# Altium PCB PCB1.PcbDoc
Units mm, origin at the board's own origin, x right, y up, seen from the top; angles counter-clockwise.
Board outline 94.87 x 108.46 mm, 2 copper layers (Top Layer, Bottom Layer); 18 components, 31 nets, 81 pads, 0 vias.
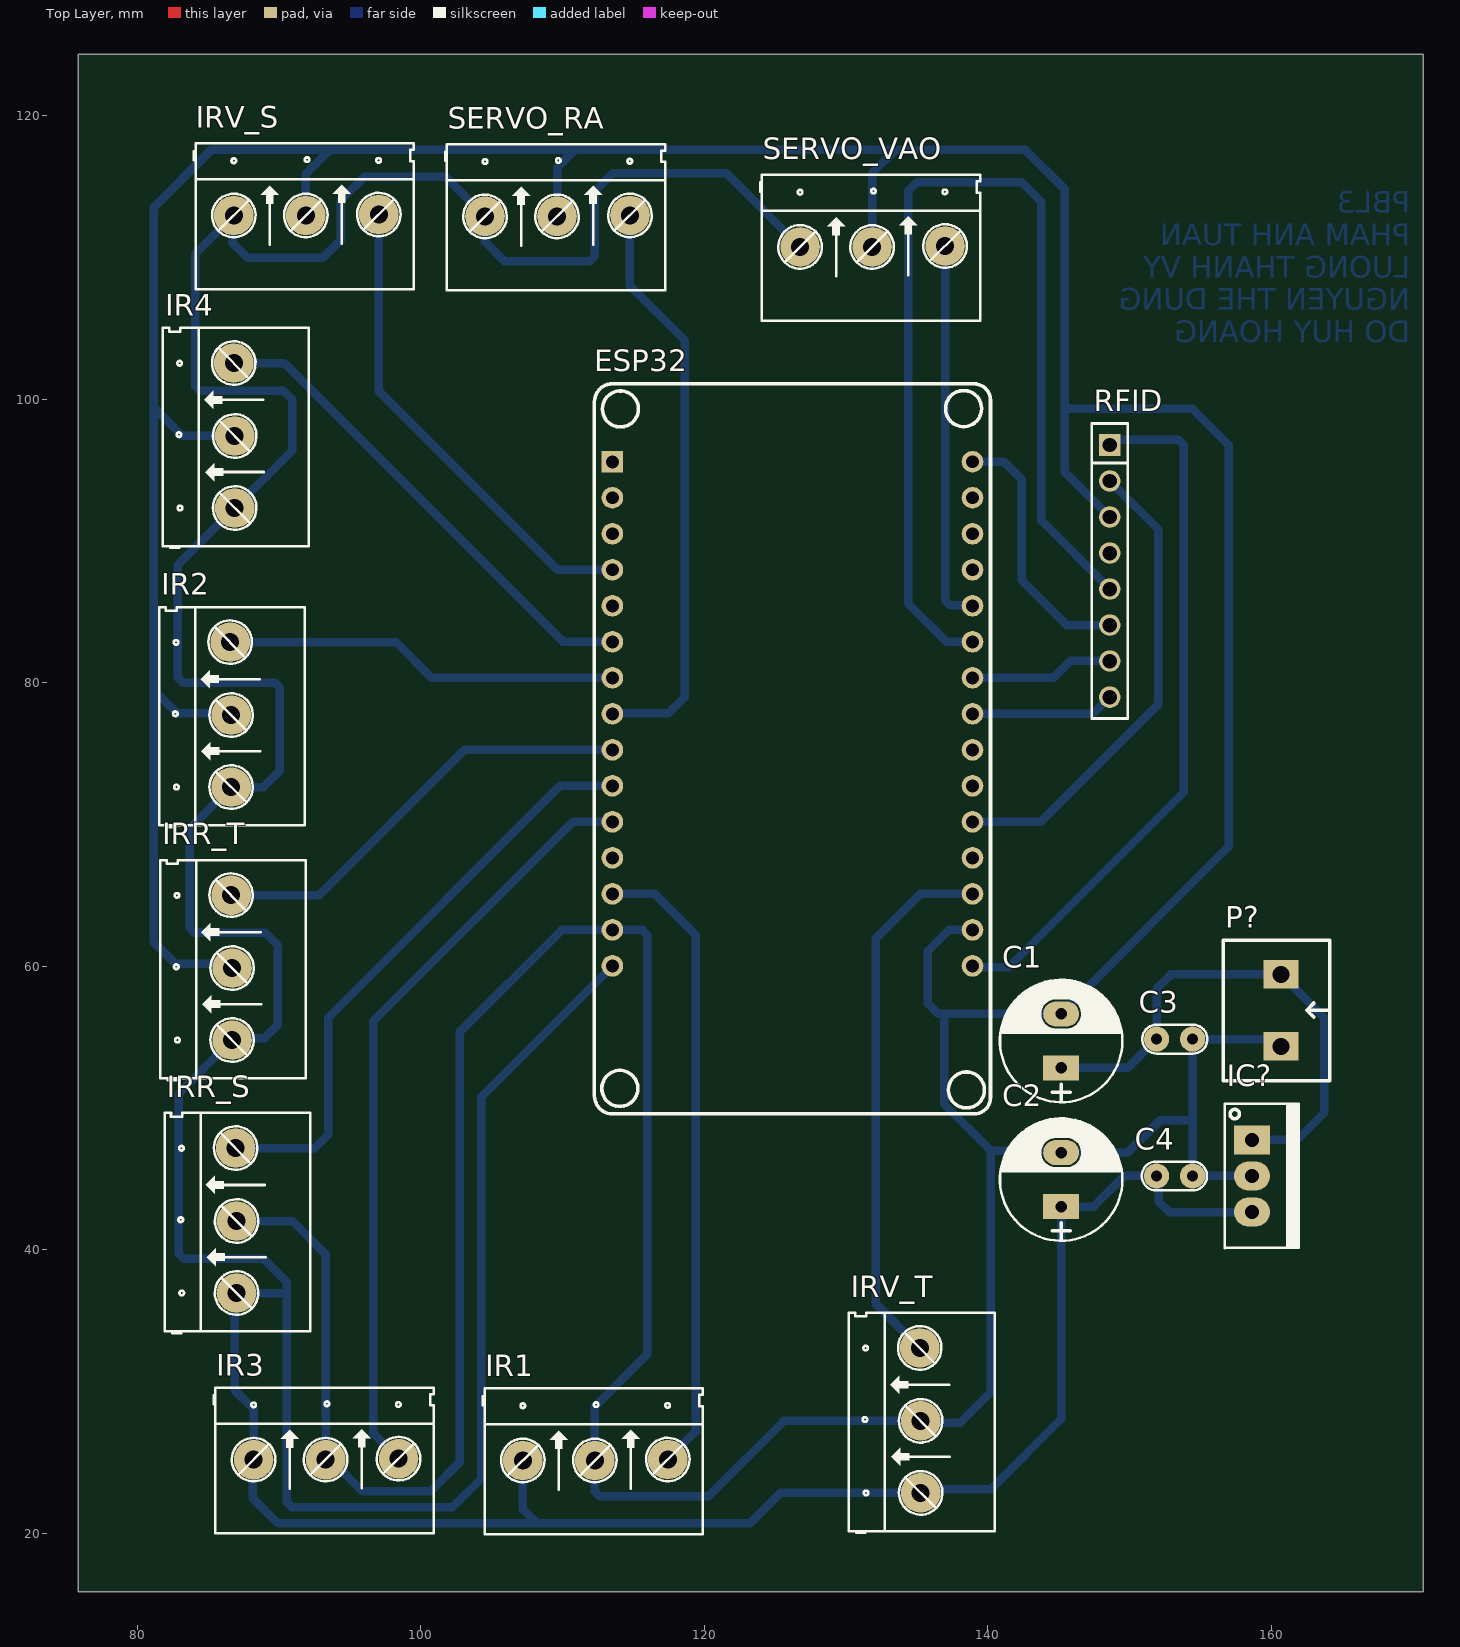
[diagram p0: Top Layer view]
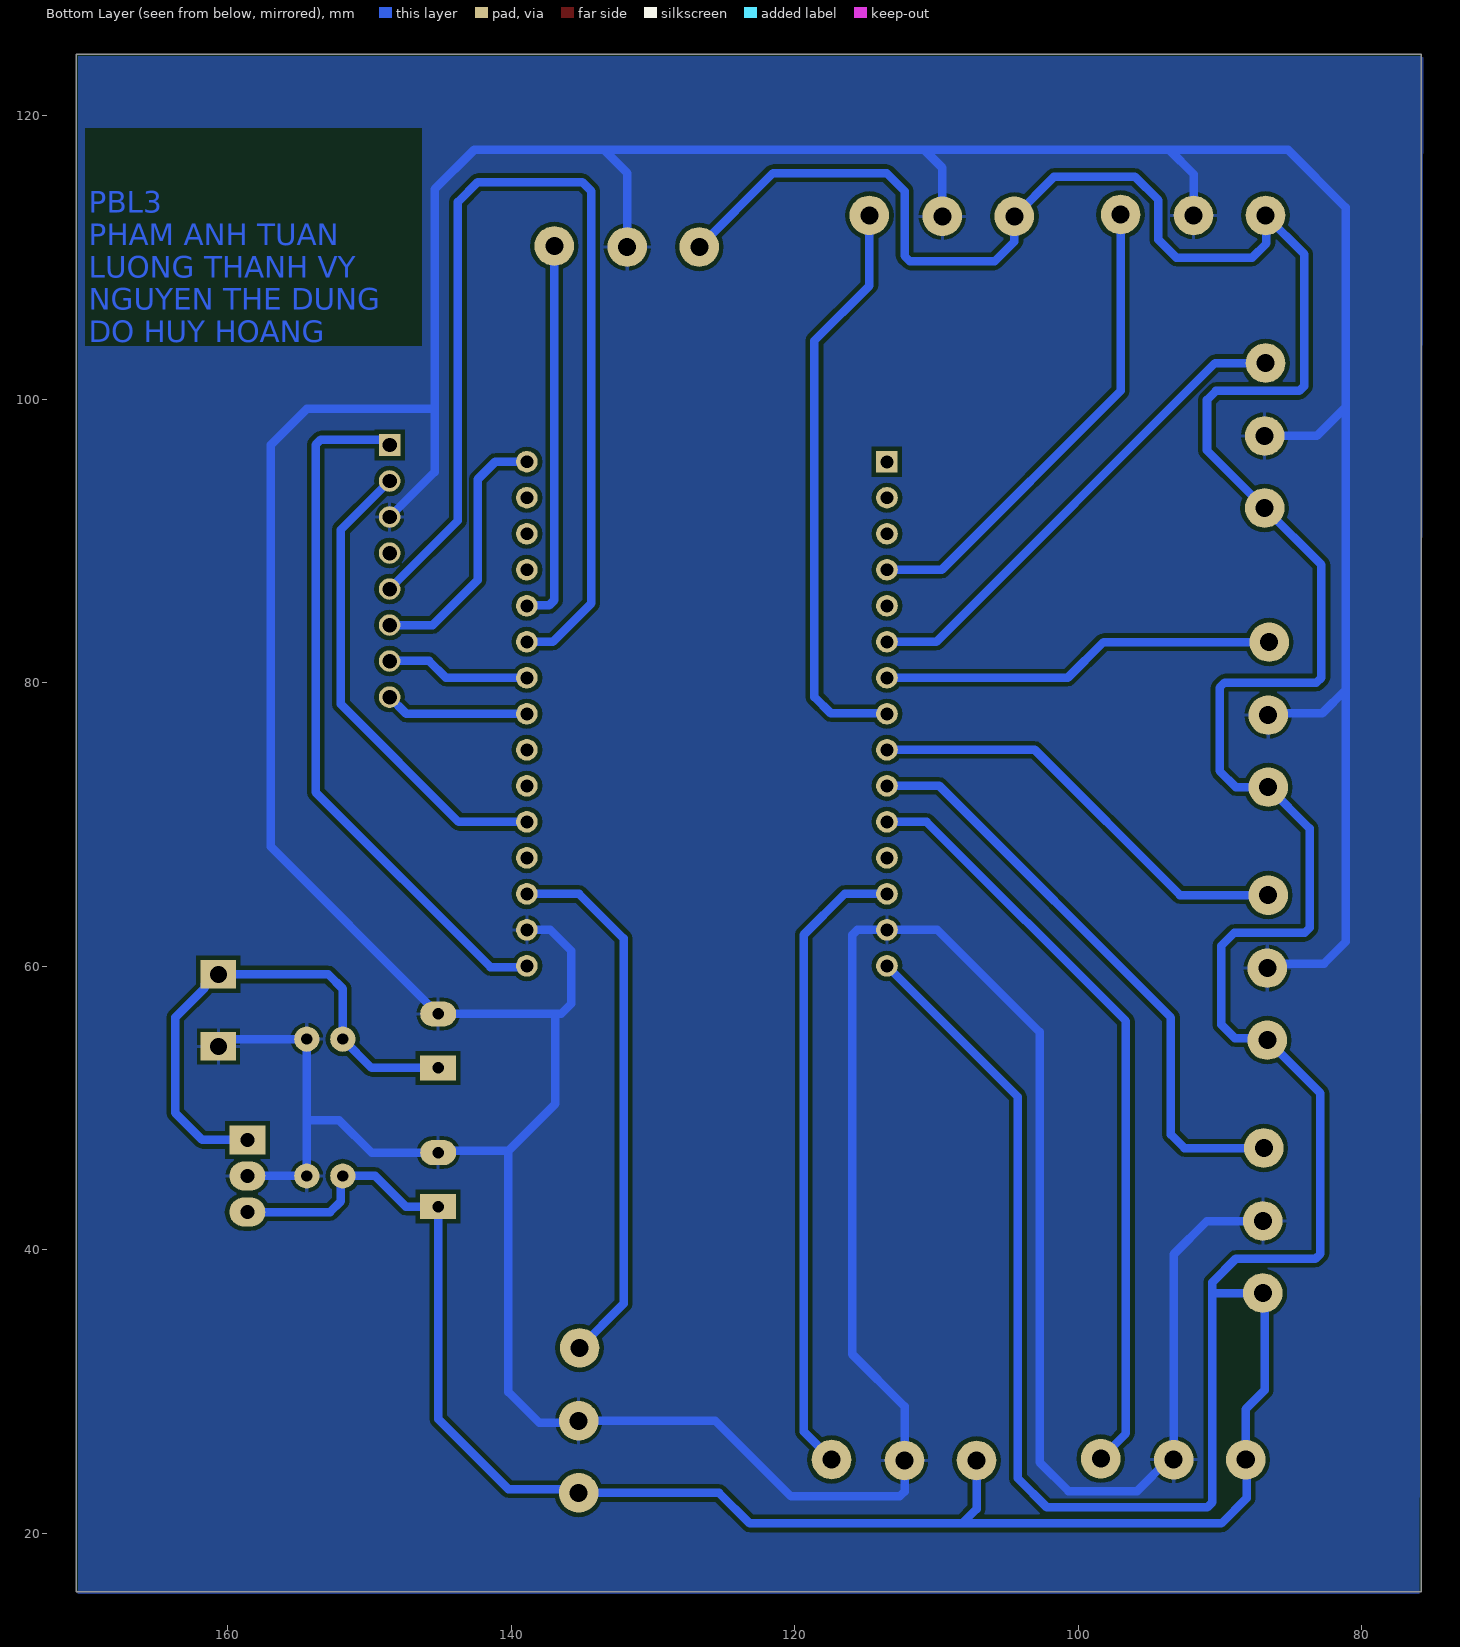
[diagram p1: Bottom Layer view, seen from below]
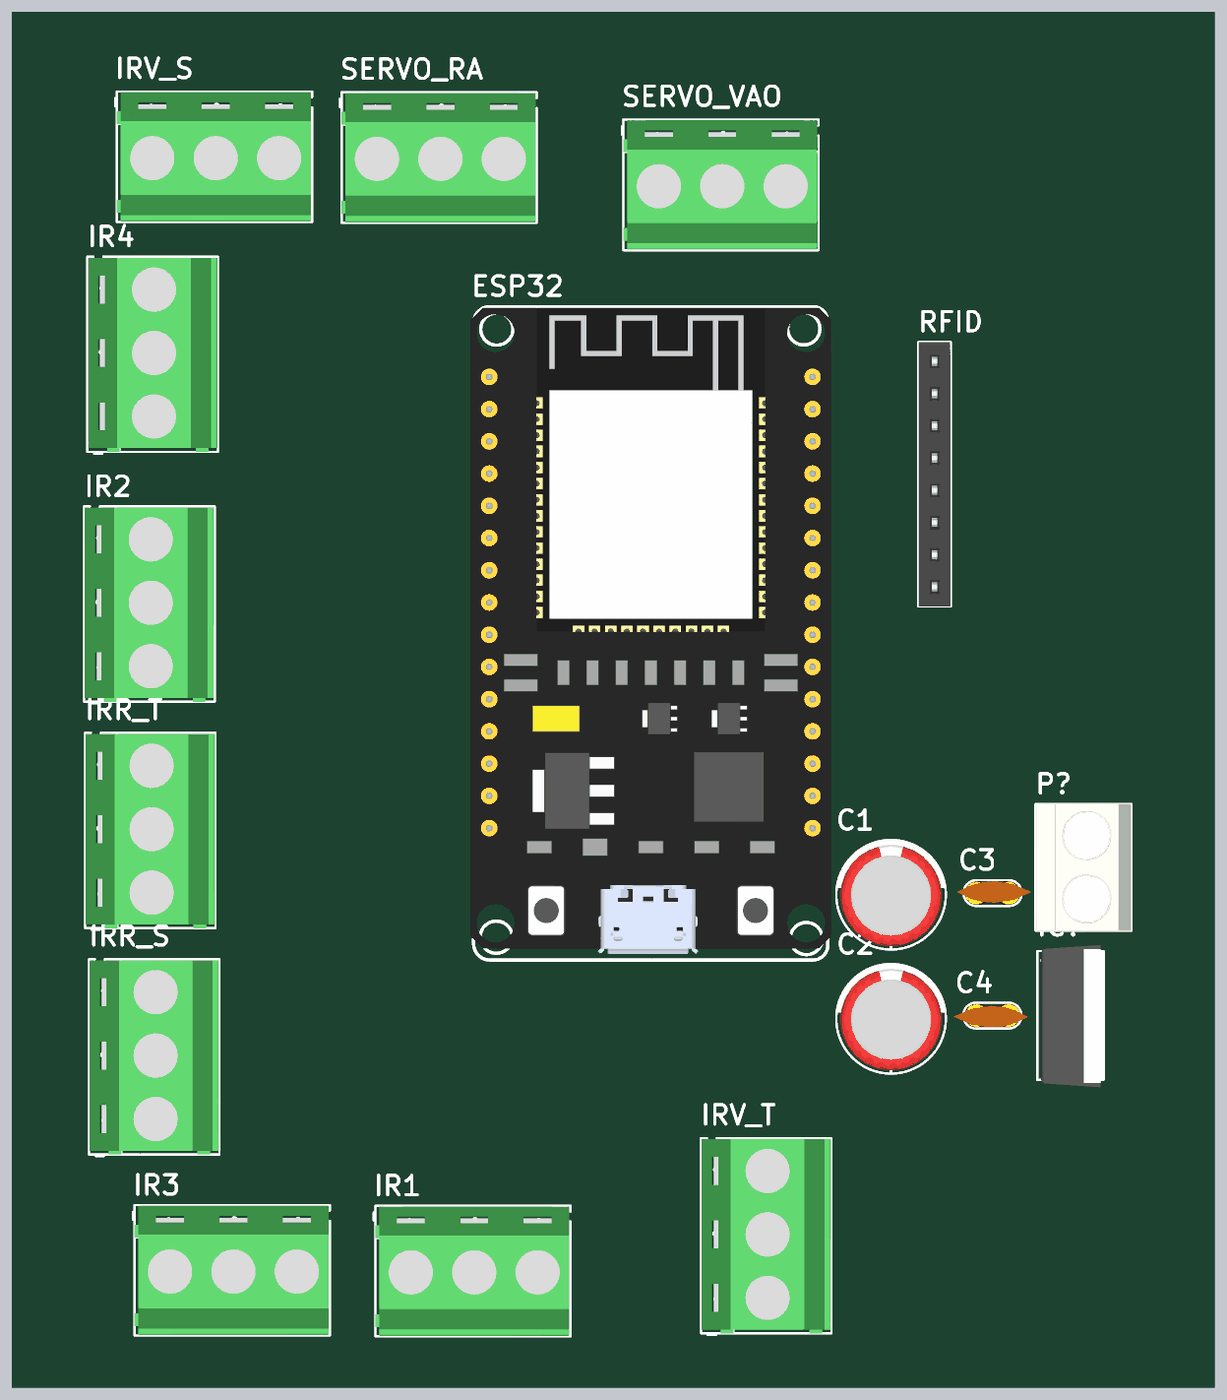
[diagram p2: 3D render of the assembled board from above, using the file's embedded part models]

## Layer stack, top to bottom
Top Solder: solder mask 0.0102, Solder Resist, Dk 3.5
Top Layer: signal copper 0.0356
Dielectric 1: dielectric 0.32, FR-4, Dk 4.8
Bottom Layer: signal copper 0.0356
Bottom Solder: solder mask 0.0102, Solder Resist, Dk 3.5

## Board outline
75.819,15.875 170.688,15.875 170.688,124.333 75.819,124.333

## Design rules (kind name [scope] priority, off if disabled: settings)
Clearance [All] p1: gap=0.25 ignorepadtopadclearanceinfootprint=FALSE except(0: Arc-Hole Track-Hole SMDPad-Hole THPad-Hole Via-Hole Fill-Hole Poly-Hole Region-Hole Text-Hole; 0.3: Arc-Fill Arc-Poly Arc-Region Track-Fill Track-Poly Track-Region SMDPad-Fill SMDPad-Poly SMDPad-Region THPad-Fill THPad-Poly THPad-Region Via-Fill Via-Poly Via-Region Fill-Fill Fill-Poly Fill-Region Poly-Poly Poly-Region Region-Region)
PolygonConnect [All] p1: connectstyle=Relief reliefconductorwidth=0.254 reliefentries=4 polygonreliefangle="90 Angle" airgapwidth=0.254
RoutingLayers [All] p1: top layer_v5=FALSE bottom layer_v5=TRUE
RoutingVias [All] p1: holewidth=0.711 width=1.27 viastyle="Through Hole" minholewidth=0.711 minwidth=1.27 maxholewidth=0.711 maxwidth=1.27
SolderMaskExpansion [All] p1: expansion=0.102 istentingtop=FALSE
Width [All] p1: maxlimit=0.75 minlimit=0.6 preferedwidth=0.6
29 further rules are at their usual default settings.

## Components (designator, comment, footprint, x,y, rotation, side; value= is the part's Value field where it differs from the comment)
C1 "100uF/25V" CP1.5/3.4 145.161,52.832 r90 top value=100uF/35V/50V
C2 "47uF/16V" CP1.5/3.4 145.161,43.053 r90 top value=100uF/35V/50V
C3 "104" CN1 151.892,54.864 r0 top value=100pF
C4 "104" CN1 154.432,45.212 r180 top value=100pF
ESP32 "ESP32-DEVKIT-V1" ESP32 126.746,75.438 r0 top
IC? "LM7805" QTO-220 158.623,47.752 r270 top
IR1 "Header 3" HED3 107.188,25.146 r0 top
IR2 "Header 3" HED3 86.614,72.644 r90 top
IR3 "Header 3" HED3 88.198,25.206 r0 top
IR4 "Header 3" HED3 86.868,92.329 r90 top
IRR_S "Header 3" HED3 86.995,36.957 r90 top
IRR_T "Header 3" HED3 86.681,54.797 r90 top
IRV_S "Header 3" HED3 86.801,112.963 r0 top
IRV_T "Header 3" HED3 135.255,22.86 r90 top
P? "Header 2 - M" "Medium - Header 2" 160.666,56.896 r270 top
RFID "JP8" JP8-C1T 148.59,96.774 r270 top
SERVO_RA "Header 3" HED3 104.521,112.903 r0 top
SERVO_VAO "Header 3" HED3 126.746,110.744 r0 top

## Footprints (in the part's own frame and the unit in brackets; to place one, negate y for a bottom-side part, rotate by r counter-clockwise, add the part's x,y. Pads: shape width x height; smd on the part's side, far side on the other; paste and mask are expansions set on the pad)
CN1 [mil]
  round 70 hole 31: 1(0,0) 2(100,0)
  silkscreen extent -40,-40 141,40, body extent -60,-30 170,37, height 265
CP1.5/3.4 [mil] "Tu hoa 220->470uF,16V, 470uF/16V,25V"
  rect 70x100 hole 32: 1(0,0)
  oval 70x100 hole 32: 2(150,0)
  silkscreen extent -95,-170 245,170, body extent -85,-157 230,157, height 446
ESP32 [mil]
  rect 60x60 hole 36: 1(-521.12,793.42)
  round 60 hole 36: 2(-521.22,693.52) 3(-521.22,593.52) 4(-521.22,493.52) 5(-521.22,393.52) 6(-521.22,293.52) 7(-521.22,193.52) 8(-521.22,93.52) 9(-521.22,-6.48) 10(-521.22,-106.48) 11(-521.22,-206.48) 12(-521.22,-306.48) 13(-521.22,-406.48) 14(-521.22,-506.48) 15(-521.22,-606.48) 16(478.78,-606.48) 17(478.78,-506.48) 18(478.78,-406.48) 19(478.78,-306.48) 20(478.78,-206.48) 21(478.78,-106.48) 22(478.78,-6.48) 23(478.78,93.52) 24(478.78,193.52) 25(478.78,293.52) 26(478.78,393.52) 27(478.78,493.52) 28(478.78,593.52) 29(478.78,693.52) 30(478.78,793.52)
  silkscreen extent -571,-1018 529,1010, body extent -582,-999 540,1006, height 378
HED3 [mil] "Header 3, 3 pin, hight 300mil, Pin to Pin 200, Colour Green"
  round 110 hole 50: 1(0,0) 2(200,0) 3(402.62,2.62)
  silkscreen extent -111,-205 500,200, body extent -106,-204 496,198, height 560
JP8-C1T [mm] "8 row, straight, gold plating"
  rect 1.52x1.52 hole 1.02: 1(0,0)
  round 1.52 hole 1.02: 2(2.54,0) 3(5.08,0) 4(7.62,0) 5(10.16,0) 6(12.7,0) 7(15.24,0) 8(17.78,0)
  silkscreen extent -1.52,-1.27 19.3,1.27, body extent -1.52,-1.25 19.3,1.25, height 8.51
"Medium - Header 2" [mm]
  rect 2x2.5 hole 1.2: 1(-2.54,0) 2(2.54,0)
  silkscreen extent -4.95,-4.08 4.95,3.43, body extent -5,-4.07 5,3.43, height 10
QTO-220 [mil] "TO-220 - 1-2-3"
  rect 80x100 hole 39: 1(0,0)
  oval 80x100 hole 39: 2(100,0) 3(200,0)
  silkscreen extent -100,-76 300,130, body extent -119,-64 322,121, height 755

## Part data
C1 C2: library part CP3, "Cap 100uF/35V - 470uF/16V", Description 1="1000uF/6,3V - 470uF/16V - 330uF - 25V", Description 2="220uF/35V - 100uF/50V - 63V - 4,7uF/200V", Description 3="22uF => 33uF100V - 3,3uF => 4,7uF/250V", Description 4="2,2uF =>3,3uF/350 - 2,2uF/400V - 1uF/450V"
C3 C4: library part CN1, "Cap np  1pF - 472pF"
IC?: library part LM78xx, "On ap +, from + 5 to + 24VDC"
IR1 IR2 IR3 IR4 IRR_S IRR_T IRV_S IRV_T SERVO_RA SERVO_VAO: library part Hed3, "Header 3 (Green)"
P?: "Header, 2-Pin, Medium", LatestRevisionDate=17-Jul-2002, LatestRevisionNote="Re-released for DXP Platform.", Publisher="Altium Limited"
RFID: "WR-PHD 2.54 mm Angled Socket Header", Manufacturer="W¨¹rth Elektronik eiSos GmbH", partNo=613008143121, ComponentLink1 Description=Manufacturer, ComponentLink1URL=http://www.we-online.com, ComponentLink2 Description=Datasheet, ComponentLink2URL=http://katalog.we-online.de/em/datasheet/6130xx143121.pdf, Created by="Karrer Zheng", Created Date="29 March 2013", NoPins=08

## Nets (pads, with @x,y where several pads share a name; then routed paths per layer and width w, separated by ;. In a path a pad name is that pad's centre, name@x,y a point inside that pad or via, vN(x,y) a via of type N, cw(c..) or ccw(c..) an arc to the next point about the centre after c; other vN are vias at no path point)
3V3: ESP32.16 RFID.1 | length 50.1
  Bottom Layer w0.6: ESP32.16 138.996,59.944 141.478,59.944 153.797,72.263 153.797,96.804 153.446,97.155 148.971,97.155 RFID.1
+5: C2.1 C4.2 ESP32.15 IC?.3 IR1.1 IR2.1 IR3.1 IR4.1 IRR_S.1 IRR_T.1 IRV_S.1 IRV_T.1 SERVO_RA.1 SERVO_VAO.1 | length 356
  Bottom Layer w0.6: IRV_S.1 IRV_S.1@86.741,112.903 ; IR1.1 107.188,21.717 108.204,20.701 ; ESP32.15 104.267,50.793 104.267,23.876 102.235,21.844 90.902,21.844 90.551,22.195 90.551,36.957 ; SERVO_VAO.1 121.539,115.951 113.538,115.951 112.268,114.681 112.268,110.109 111.887,109.728 105.918,109.728 104.521,111.125 SERVO_RA.1 101.727,115.697 96.012,115.697 94.361,114.046 94.361,111.252 93.091,109.982 87.757,109.982 86.741,110.998 IRV_S.1@86.741,112.903 ; IC?.3 152.781,42.672 152.03,43.423 152.03,45.074 C4.2 149.606,45.212 147.447,43.053 C2.1 145.161,28.067 140.208,23.114 135.509,23.114 IRV_T.1 125.349,22.86 123.19,20.701 108.204,20.701 ; IRV_S.1@86.741,112.903 84.074,110.236 84.074,100.935 84.425,100.584 90.297,100.584 90.932,99.949 90.932,96.393 IR4.1 82.863,88.324 82.863,80.361 83.215,80.01 89.692,80.01 90.043,79.659 90.043,73.787 88.9,72.644 IR2.1 83.693,69.723 83.693,62.708 84.044,62.357 89.027,62.357 89.916,61.468 89.916,55.88 88.978,54.942 86.825,54.942 IRR_T.1 82.931,51.048 82.931,39.721 83.282,39.37 88.9,39.37 90.551,37.719 90.551,36.957 ; 90.551,36.957 IRR_S.1 86.868,36.83 86.868,30.099 88.199,28.768 IR3.1 88.138,25.146 88.138,22.479 89.916,20.701 108.204,20.701
+12: C1.1 C3.1 IC?.1 P?.1 | length 37.4
  Bottom Layer w0.6: C1.1 149.86,52.832 C3.1 151.892,58.42 152.908,59.436 P?.1 160.916,59.436 161.616,58.736 161.616,58.486 163.703,56.399 163.703,49.657 161.798,47.752 IC?.1
D2: ESP32.19
D4_RST: ESP32.20 RFID.2 | length 33.7
  Bottom Layer w0.6: ESP32.20 143.726,70.193 152.019,78.486 152.019,90.805 RFID.2
D5_SDA: ESP32.23 RFID.8 | length 10.2
  Bottom Layer w0.6: ESP32.23 147.409,77.813 RFID.8
D12: ESP32.12
D13: ESP32.13 IR1.3 | length 44.9
  Bottom Layer w0.6: ESP32.13 116.497,65.113 119.38,62.23 119.38,27.178 IR1.3
D14: ESP32.11 IR3.3 | length 54.3
  Bottom Layer w0.6: IR3.3 96.647,27.051 96.647,56.134 110.706,70.193 ESP32.11
D15: ESP32.18 IRV_T.3 | length 38.3
  Bottom Layer w0.6: IRV_T.3 132.08,36.195 132.08,61.976 135.217,65.113 ESP32.18
D16: ESP32.21
D17: ESP32.22
D18_SCK: ESP32.24 RFID.7 | length 10.2
  Bottom Layer w0.6: ESP32.24 144.615,80.353 145.801,81.539 148.585,81.539 RFID.7
D19_MISO: ESP32.25 RFID.5 | length 74.3
  Bottom Layer w0.6: ESP32.25 137.071,82.893 134.366,85.598 134.366,114.681 135.001,115.316 142.367,115.316 143.764,113.919 143.764,91.44 RFID.5
D21: ESP32.26 SERVO_VAO.3 | length 27.1
  Bottom Layer w0.6: SERVO_VAO.3 136.973,85.822 137.324,85.471 138.869,85.471 ESP32.26
D22: ESP32.29
D23_MOSI: ESP32.30 RFID.6 | length 18.6
  Bottom Layer w0.6: ESP32.30 141.135,95.593 142.367,94.361 142.367,87.249 145.542,84.074 RFID.6
D25: ESP32.8 SERVO_RA.3 | length 41.2
  Bottom Layer w0.6: ESP32.8 113.545,77.851 117.475,77.851 118.618,78.994 118.618,104.14 114.748,108.01 SERVO_RA.3
D26: ESP32.9 IRR_T.3 | length 31.1
  Bottom Layer w0.6: IRR_T.3 92.837,65.024 103.086,75.273 ESP32.9
D27: ESP32.10 IRR_S.3 | length 42
  Bottom Layer w0.6: IRR_S.3 92.523,47.184 93.472,48.133 93.472,56.388 109.817,72.733 ESP32.10
D32: ESP32.6 IR4.3 | length 34.8
  Bottom Layer w0.6: IR4.3 90.357,102.556 110.02,82.893 ESP32.6
D33: ESP32.7 IR2.3 | length 28
  Bottom Layer w0.6: IR2.3 98.231,82.871 100.749,80.353 ESP32.7
D34: ESP32.4 IRV_S.3 | length 34.1
  Bottom Layer w0.6: IRV_S.3 97.028,100.584 109.639,87.973 ESP32.4
D35: ESP32.5
EN: ESP32.1
GND: C1.2 C2.2 C3.2 C4.1 ESP32.14 ESP32.17 IC?.2 IR1.2 IR2.2 IR3.2 IR4.2 IRR_S.2 IRR_T.2 IRV_S.2 IRV_T.2 P?.2 RFID.3 SERVO_RA.2 SERVO_VAO.2 | length 470.8
  Bottom Layer w0.6: IR2.2 86.487,77.851 82.804,77.851 81.153,79.502 ; IRR_T.2 86.36,60.198 82.677,60.198 81.153,61.722 81.153,79.502 ; IRR_S.2@86.868,42.164 IRR_S.2 90.932,42.037 93.279,39.69 IR3.2 93.636,25.207 95.855,22.987 100.711,22.987 102.743,25.019 102.743,55.372 109.944,62.573 ESP32.14 115.6,62.573 115.951,62.222 115.951,32.639 112.268,28.956 IR1.2 112.268,22.957 112.619,22.606 120.269,22.606 125.603,27.94 IRV_T.2 135.382,27.813 138.049,27.813 140.208,29.972 140.208,46.99 ; IR4.2 83.185,97.409 81.153,99.441 ; IRV_S.2 91.882,115.885 93.599,117.602 ; SERVO_RA.2 109.601,116.332 110.871,117.602 ; SERVO_VAO.2 131.826,115.951 133.477,117.602 ; ESP32.17 138.903,62.569 137.245,62.569 135.763,61.087 135.763,57.374 136.495,56.642 136.906,56.642 ; RFID.3 145.415,94.869 145.415,99.314 ; IC?.2 C4.1 154.432,49.149 ; P?.2 160.158,54.864 C3.2 154.432,49.149 ; 81.153,79.502 81.153,99.441 ; 81.153,99.441 81.153,113.538 85.217,117.602 93.599,117.602 ; 93.599,117.602 110.871,117.602 ; 110.871,117.602 133.477,117.602 ; 133.477,117.602 142.621,117.602 145.415,114.808 145.415,99.314 ; 136.906,56.642 136.906,50.292 140.208,46.99 ; 136.906,56.642 C1.2 145.223,56.642 145.767,57.186 145.767,57.248 156.972,68.453 156.972,96.774 154.432,99.314 145.415,99.314 ; 140.208,46.99 145.034,46.99 C2.2 149.86,46.863 152.146,49.149 154.432,49.149
RQ: RFID.4
RX0: ESP32.27
TX0: ESP32.28
VN: ESP32.3
VP: ESP32.2

## Polygon pours and split planes (outlines as drawn)
GND on Bottom Layer "GND_L02_P000" (solid, remove dead copper, pour order 0): 75.692,124.079 75.819,124.206 170.561,124.206 170.561,16.002 170.688,15.875 170.561,15.748 75.946,15.748

## Other copper
Bottom Layer:
  text "PBL3 / PHAM ANH TUAN / LUONG THANH VY / NGUYEN THE DUNG / DO HUY HOANG" at 169.799,104.013 h1.52

## Text inside footprints (layer, text, board x,y; h text height)
ESP32: Mechanical 15 "devikit" at 122.417,85.685 h2.03 r1; Mechanical 15 "V1" at 124.94,81.875 h2.03